# Altium PCB BoostConverter.PcbDoc
Units mm, origin at the board's own origin, x right, y up, seen from the top; angles counter-clockwise.
Board outline 30.61 x 36.7 mm, 2 copper layers (Top Layer, Bottom Layer); 33 components, 22 nets, 98 pads, 0 vias.
Unrouted connection lines stored in the file: 70.
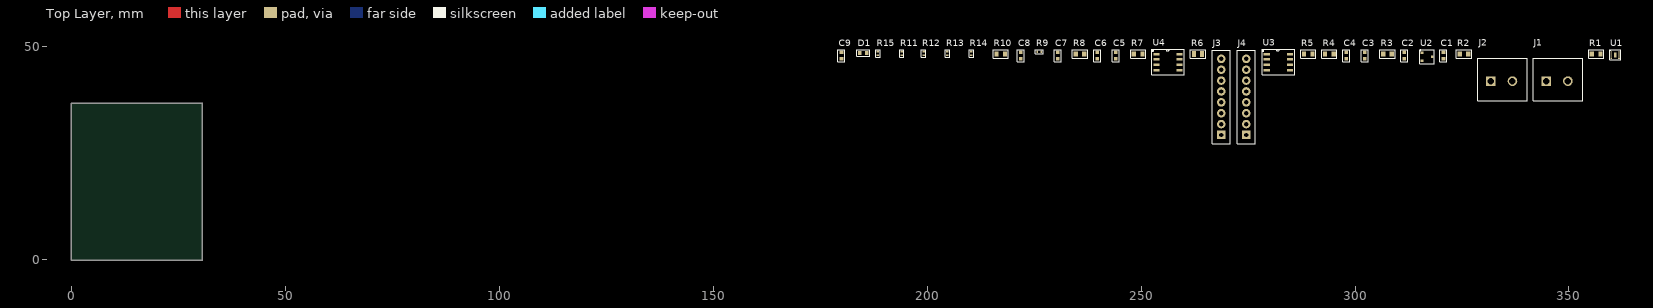
[diagram p0: Top Layer view]
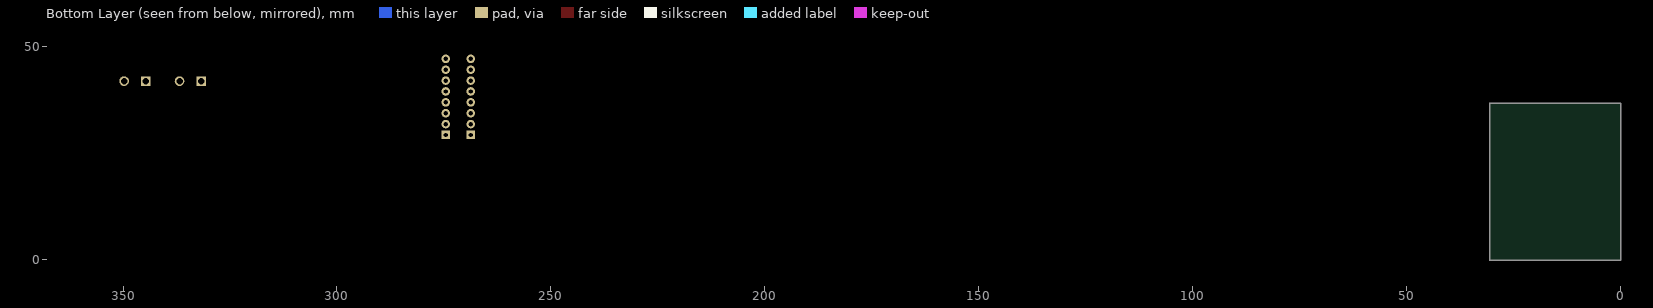
[diagram p1: Bottom Layer view, seen from below]

## Layer stack, top to bottom
Top Solder: solder mask 0.0102, Solder Resist, Dk 3.5
Top Layer: signal copper 0.0356
Dielectric 1: dielectric 0.32, FR-4, Dk 4.8
Bottom Layer: signal copper 0.0356
Bottom Solder: solder mask 0.0102, Solder Resist, Dk 3.5

## Board outline
0,-0.064 cw(c0,0) -0.064,0 -0.064,36.576 cw(c0,36.576) 0,36.64 30.48,36.64 cw(c30.48,36.576) 30.544,36.576 30.544,0.127 cw(c30.48,0.127) 30.487,0.064 cw(c30.48,0) 30.544,0 cw(c30.48,0) 30.48,-0.064

## Design rules (kind name [scope] priority, off if disabled: settings)
Clearance [All] p1: gap=0.254 ignorepadtopadclearanceinfootprint=FALSE except(0: Arc-Hole Track-Hole SMDPad-Hole THPad-Hole Via-Hole Fill-Hole Poly-Hole Region-Hole Text-Hole)
PolygonConnect [All] p1: connectstyle=Relief reliefconductorwidth=0.254 reliefentries=4 polygonreliefangle="90 Angle" airgapwidth=0.254
RoomDefinition BoostConverter [InComponentClass('BoostConverter')] p1: confinementstyle=ConfineIn formatcopy=TRUE lockcomponents=FALSE outline 178.943,26.797 362.331,26.797 362.331,51.943 178.943,51.943
RoutingVias [All] p1: holewidth=0.711 width=1.27 viastyle="Through Hole" minholewidth=0.711 minwidth=1.27 maxholewidth=0.711 maxwidth=1.27
SolderMaskExpansion [All] p1: expansion=0.102
Width [All] p1: maxlimit=0.254 minlimit=0.254 preferedwidth=0.254
30 further rules are at their usual default settings.

## Components (designator, comment, footprint, x,y, rotation, side; value= is the part's Value field where it differs from the comment)
C1 "ANCAP110040340E0000" C0603-N 320.675,47.752 r0 top value="1 µF"
C2 "ANCAP0UF1006030412" C0603-N 311.531,47.752 r0 top value="0.1 µF"
C3 "ANCAP110040340E0000" C0603-N 302.26,47.752 r0 top value="1 µF"
C4 "ANCAP110040340E0000" C0603-N 297.942,47.752 r0 top value="1 µF"
C5 "ANCAP0UF1006030412" C0603-N 244.094,47.752 r0 top value="0.1 µF"
C6 "ANCAP0UF1006030412" C0603-N 239.776,47.752 r0 top value="0.1 µF"
C7 "ANCAP0UF1006030412" C0603-N 230.505,47.752 r0 top value="0.1 µF"
C8 "ANCAP110040340E0000" C0603-N 221.869,47.752 r0 top value="1 µF"
C9 "ANCAP0UF1006030412" C0603-N 179.959,47.752 r0 top value="0.1 µF"
D1 "ANLEDQTLP601C4TR00" QTLP601C4TR-0603 185.039,48.387 r0 top value="Green LED"
J1 "ANCON02202P1757242" 796911-2 347.218,41.783 r0 top value="2POS 90DEG 5.08MM"
J2 "ANCON02202P1757242" 796911-2 334.264,41.783 r0 top value="2POS 90DEG 5.08MM"
J3 "ANCON2000824000000" 8POS 268.732,29.21 r90 top value="Header 5x1"
J4 "ANCON2000824000000" 8POS 274.574,29.21 r90 top value="Header 5x1"
R1 "ANRES10K006031T700" 0603-N 356.362,48.133 r0 top value=10k
R2 "ANRES1K0006033BC00" 0603-N 325.501,48.133 r0 top value=1k
R3 "ANRES1K0006033BC00" 0603-N 307.594,48.133 r0 top value=1k
R4 "ANRES10K006031T700" 0603-N 294.005,48.133 r0 top value=10k
R5 "ANRES10K006031T700" 0603-N 289.052,48.133 r0 top value=10k
R6 "ANRESE240215030000" 0805-N 263.271,48.133 r0 top value=15k
R7 "ANRES10K006031T700" 0603-N 249.301,48.133 r0 top value=10k
R8 "ANRESE240147010000" 0603-N 235.712,48.133 r0 top value="470 ohm"
R9 "ANRESE240000000000" 0402-N 226.187,48.641 r0 top value="0 ohm"
R10 "ANRES1K0006033BC00" 0603-N 217.17,48.133 r0 top value=1k
R11 "ANRESE240000000000" 0402-N 194.056,48.26 r90 top value="0 ohm"
R12 "ANRESE240000000000" 0402-N 199.136,48.26 r90 top value="0 ohm"
R13 "ANRESE240000000000" 0402-N 204.724,48.26 r90 top value="0 ohm"
R14 "ANRESE240000000000" 0402-N 210.312,48.26 r90 top value="0 ohm"
R15 "ANRESE240000000000" 0402-N 188.468,48.26 r90 top value="0 ohm"
U1 "ANICMIC2606YMLTR00" MIC2606YML-TR 360.807,47.879 r0 top
U2 "ANICMAX6106EURTTRN" MAX6106EUR+T 316.865,47.498 r0 top
U3 "ANICMCP4921EMCND00" MCP4921T-E/SN 282.067,46.228 r0 top
U4 "ANICMCP3551ESNND00" MCP3551-E/SN 256.286,46.228 r0 top

## Footprints (in the part's own frame and the unit in brackets; to place one, negate y for a bottom-side part, rotate by r counter-clockwise, add the part's x,y. Pads: shape width x height; smd on the part's side, far side on the other; paste and mask are expansions set on the pad)
8POS [mm]
  rect 2x2 hole 1.02: 1(0,0)
  round 2 hole 1.02: 2(2.54,0) 3(5.08,0) 4(7.62,0) 5(10.16,0) 6(12.7,0) 7(15.24,0) 8(17.78,0)
  silkscreen extent -2.03,-2.16 19.81,2.16, body extent -1.27,-1.25 19.05,1.25, height 8.11
0402-N [mm]
  rect 0.4x0.6 smd mask+0.05: 1(-0.45,0) 2(0.45,0)
  silkscreen extent -0.89,-0.51 0.89,0.51, body extent -0.5,-0.25 0.5,0.25, height 0.36
0603-N [mm]
  rect 1x1.25 smd mask+0.05: 1(-1,0) 2(1,0)
  silkscreen extent -1.78,-1.02 1.78,1.02, body extent -0.97,-0.63 1.02,0.63, height 0.5
0805-N [mm]
  rect 0.98x1.35 smd mask+0.05: 1(-0.935,0) 2(0.935,0)
  silkscreen extent -1.78,-1.02 1.78,1.02, body extent -1,-0.6 1,0.6, height 0.71
796911-2 [mm]
  rect 2.25x2.25 hole 1.5 mask+0.05: 1(-2.54,0)
  round 2.25 hole 1.5 mask+0.05: 2(2.54,0)
  silkscreen extent -5.59,-4.57 5.97,5.33, body extent -5.08,-4.17 5.58,7.49, height 13.51
C0603-N [mm]
  rect 0.85x0.8 smd mask+0.05: 1(0,0.75) 2(0,-0.75)
  silkscreen extent -0.82,-1.4 0.8,1.4, body extent -0.4,-0.8 0.4,0.8, height 0.9
MAX6106EUR+T [mm]
  rect 0.65x0.55 smd mask+0.05: 1(-1.207,0.95) 2(-1.207,-0.95) 3(1.208,0)
  silkscreen extent -1.75,-1.63 1.65,1.65, body extent -1.32,-1.52 1.32,1.52, height 1.12
MCP3551-E/SN [mm]
  rect 1.45x0.6 smd mask+0.05: 1(-2.7,1.875) 2(-2.7,0.625) 3(-2.7,-0.625) 4(-2.7,-1.875) 5(2.7,-1.875) 6(2.7,-0.625) 7(2.7,0.625) 8(2.7,1.875)
  silkscreen extent -3.8,-2.9 3.8,2.98, body extent -3,-2.48 3,2.43, height 1.86
MCP4921T-E/SN [mm]
  rect 1.45x0.6 smd mask+0.05: 1(-2.7,1.875) 2(-2.7,0.625) 3(-2.7,-0.625) 4(-2.7,-1.875) 5(2.7,-1.875) 6(2.7,-0.625) 7(2.7,0.625) 8(2.7,1.875)
  silkscreen extent -3.8,-2.9 3.8,2.98, body extent -3,-2.4 3,2.5, height 1.76
MIC2606YML-TR [mm]
  rect 0.37x0.27 smd mask+0.05: 1(-0.9,0.75) 2(-0.9,0.25) 3(-0.9,-0.25) 4(-0.9,-0.75) 5(0.9,-0.75) 6(0.9,-0.25) 7(0.9,0.25) 8(0.9,0.75)
  rect 0.62x1.2 smd mask+0.05: 9(0,0)
  silkscreen extent -1.3,-1.08 1.28,1.25, body extent -1,-1 1,1.25, height 1.76
QTLP601C4TR-0603 [mm]
  rect 0.8x1 smd mask+0.05: 1(-0.825,0) 2(0.825,0)
  silkscreen extent -1.52,-0.76 1.52,0.76, body extent -0.8,-0.42 0.8,0.38, height 0.61

## Part data
C1 C3 C4 C8: library part CL10A105KP8NNNC, "CAP CER 1UF 10V X5R 0603", Digi-Key Part Number=1276-1182-2-ND, Manufacturer="Samsung Electro-Mechanics", Operating Temperature="-55°C ~ 85°C", Voltage - Rated=10V, Order Number=CL10A105KP8NNNC
C2 C5 C6 C7 C9: library part 0603YC104JAT2A, "0.10µF ±5% 16V Ceramic Capacitor X7R 0603 (1608 Metric)", Digi-Key Part Number=478-3726-2-ND, Manufacturer="KYOCERA AVX", Operating Temperature="-55°C ~ 125°C", Voltage - Rated=16V, Order Number=0603YC104JAT2A
D1: library part QTLP601C4TR, "Green 570nm LED Indication - Discrete 2.1V 0603 (1608 Metric)", Current - Test="20 mA", Digi-Key Part Number=1080-1405-2-ND, Manufacturer="Everlight Electronics Co Ltd", Voltage - Forward (Vf) (Typ)="2.1 V"
J1 J2: library part 796911-2, "TERM BLK 2P SIDE ENT 5.08MM PCB", Current="17.5 A", Digi-Key Part Number=A121381-ND, Manufacturer="Phoenix Contact", Voltage="300 V", Name="Header 2x1"
J3 J4: library part PH1-08-UA, "8 POS HEADER", Current Rating="3 A", Digi-Key Part Number=2057-PH1-08-UA-ND, Manufacturer="Adam Tech", Voltage Rating=250V
R1 R4 R5 R7: library part RC0603FR-0710KL, "10K 1/10W 5% 0603", Digi-Key Part Number=311-10.0KHRTR-ND, Manufecturer=YAGEO, Operating Temperature="-55°C ~ 155°C", Detailed Description="10 kOhms ±1% 0.1W, 1/10W Chip Resistor 0603 (1608 Metric) Moisture Resistant Thick Film"
R2 R3 R10: library part CRCW06031K00FKEAHP, "RES SMD 1K OHM 1% 1/3W 0603", Digi-Key Part Number=541-1.00KSTR-ND, Manufecturer="Vishay Dale", Operating Temperature="-55°C ~ 155°C", Detailed Description="1 kOhms ±1% 0.333W, 1/3W Chip Resistor 0603 (1608 Metric) Automotive AEC-Q200, Pulse Withstanding Thick Film"
R6: library part ERJ-6ENF1502V, "E24, 15K, 0805, %1", Digi-Key Part Number=P15.0KCTR-ND, Manufecturer="Panasonic - ECG", Operating Temperature="-55°C ~ 155°C", Detailed Description="15 kOhms ±1% 0.125W, 1/8W Chip Resistor 0805 (2012 Metric) Automotive AEC-Q200 Thick Film"
R8: library part ERJ-3EKF4700V, "E24, 470R, 0603, %1", Digi-Key Part Number=P470HTR-ND, Manufecturer="Panasonic Electronic Components", Operating Temperature="-55°C ~ 155°C", Detailed Description="470 Ohms ±1% 0.1W, 1/10W Chip Resistor 0603 (1608 Metric) Automotive AEC-Q200 Thick Film", Manufecturer Product Number=ERJ-3EKF4700V
R9 R11 R12 R13 R14 R15: library part 6-1622826-4, "0R, 0402, Thick Film, 1/16W, %1", Digi-Key Part Number=A106025TR-ND, Manufecturer="TE Connectivity Passive Product", Manufecturer Part Number=CRG0402ZR, Operating Temperature="-55°C ~ 155°C", Detailed Description="0 Ohms Jumper 0.063W, 1/16W Chip Resistor 0402 (1005 Metric) Thick Film"
U1: library part MIC2606YML-TR, "IC REG BOOST ADJ 500MA 8MLF", Current - Output="500mA (Switch)", Manufacturer="Microchip Technology", Operating Temperature="-40°C ~ 125°C (TJ)", Voltage - Output (Min/Fixed)=4.5V, Name=MIC2606
U2: library part MAX6106EUR+T, "IC VREF SERIES 0.4% SOT23-3", Current - Output=5mA, Manufacturer="Analog Devices Inc./Maxim Integrated", Operating Temperature="-40°C ~ 85°C (TA)", Voltage - Output (Min/Fixed)=2.048V, Name=MAX6106
U3: library part MCP4921T-E/SN, "IC DAC 12BIT V-OUT 8DFN", Digi-Key Part Number=MCP4921T-E/SNTR-ND, Manufacturer="Microchip Technology", Operating Temperature="-40°C ~ 125°C", Voltage - Supply, Analog/Digital="2.7V ~ 5.5V", Input Type=Differential, Name=MCP49x1, Number of Bits=12
U4: library part MCP3551-E/SN, "IC ADC 22BIT SIGMA-DELTA 8SOIC", Manufacturer="Microchip Technology", Operating Temperature="-40°C ~ 125°C", Voltage - Supply, Analog/Digital="2.7V ~ 5.5V", Input Type=Differential, Name=MCP3550/1/3

## Nets (pads, with @x,y where several pads share a name; then routed paths per layer and width w, separated by ;. In a path a pad name is that pad's centre, name@x,y a point inside that pad or via, vN(x,y) a via of type N, cw(c..) or ccw(c..) an arc to the next point about the centre after c; other vN are vias at no path point)
CS1: J3.3 R7.2 U3.2
CS2: J3.1 R4.1 U4.7
EN: U1.4
FB: R1.1 R2.2 R3.2 U1.7
GND: C1.1 C2.1 C3.2 C4.2 C5.1 C6.1 C7.1 C8.2 C9.2 D1.2 J1.2 J2.2 J3.8 J4.8 R3.1 R8.1 U1.8 U1.9 U2.3 U3.5 U3.7 U4.3 U4.4
MISO: J3.5 U4.6
MOSI: J3.6 U3.4
NetD1_1: D1.1 R10.1
NetJ3_2: J3.2 R5.1
NetR6_1: R6.1 R8.2 U4.2
SCK: J3.4 U3.3 U4.5
SS: C2.2 U1.5
SW: U1.6
VCC: C4.1 C6.2 C7.2 R4.2 R5.2 R7.1 R10.2 R11.2 R12.1 U2.1 U3.1 U4.8
VCC-3.3V: J3.7 R12.2
VCC-5V: J4.7 R11.1 R13.1
VCC-EXT: J2.1 R14.2
VDAC: C5.2 R2.1 U3.8
VDD: C9.1 R9.2 R15.1 R15.2 U1.3
VIN: C8.1 R9.1 R13.2 R14.1 U1.2
VOUT: C1.2 J1.1 R1.2 R6.2 U1.1
VREF: C3.1 U2.2 U3.6 U4.1
pads on no net: J4.1 J4.2 J4.3 J4.4 J4.5 J4.6